# Altium PCB PCB.PcbDoc
Units mm, origin at the board's own origin, x right, y up, seen from the top; angles counter-clockwise.
Board outline 48.3 x 16.3 mm, 2 copper layers (Top Layer, Bottom Layer), stack 1.271 mm thick; 28 components, 37 nets, 133 pads, 55 vias.
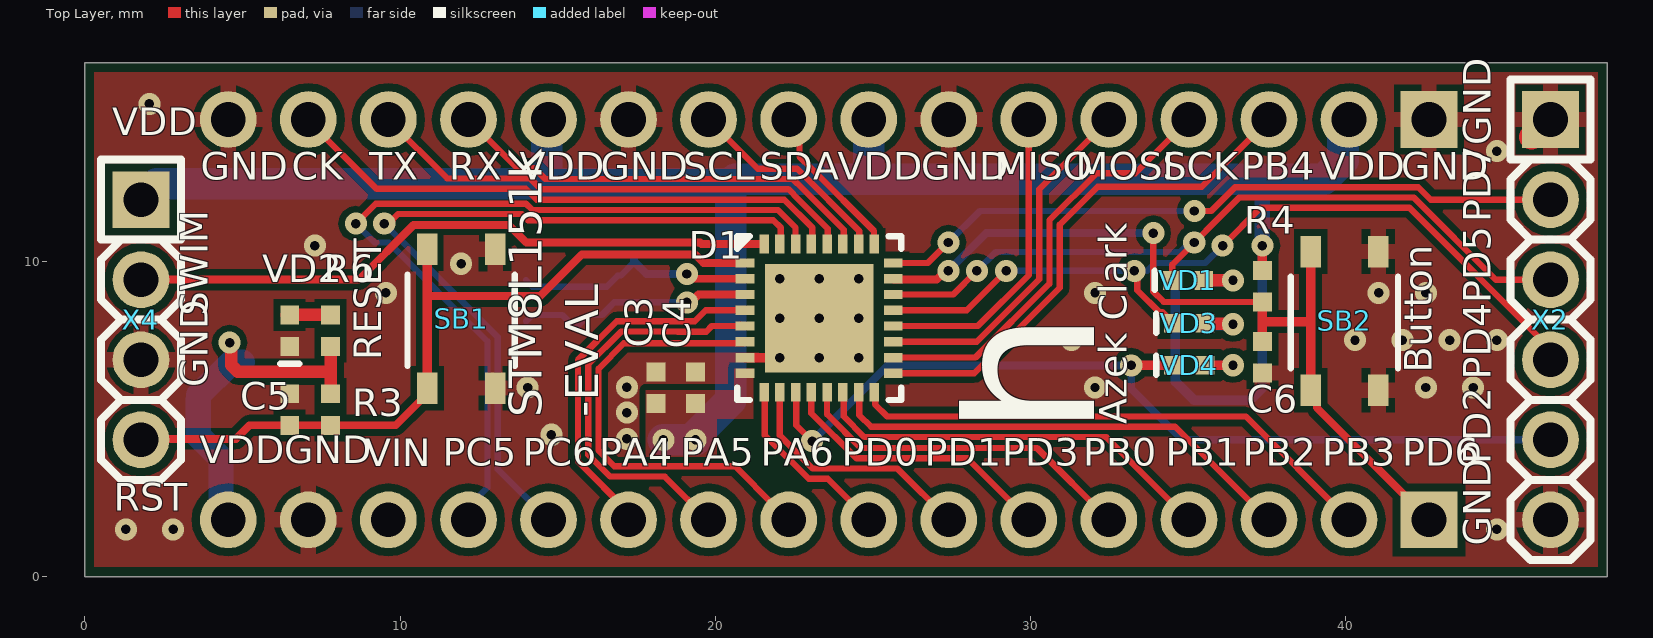
[diagram p0: Top Layer view]
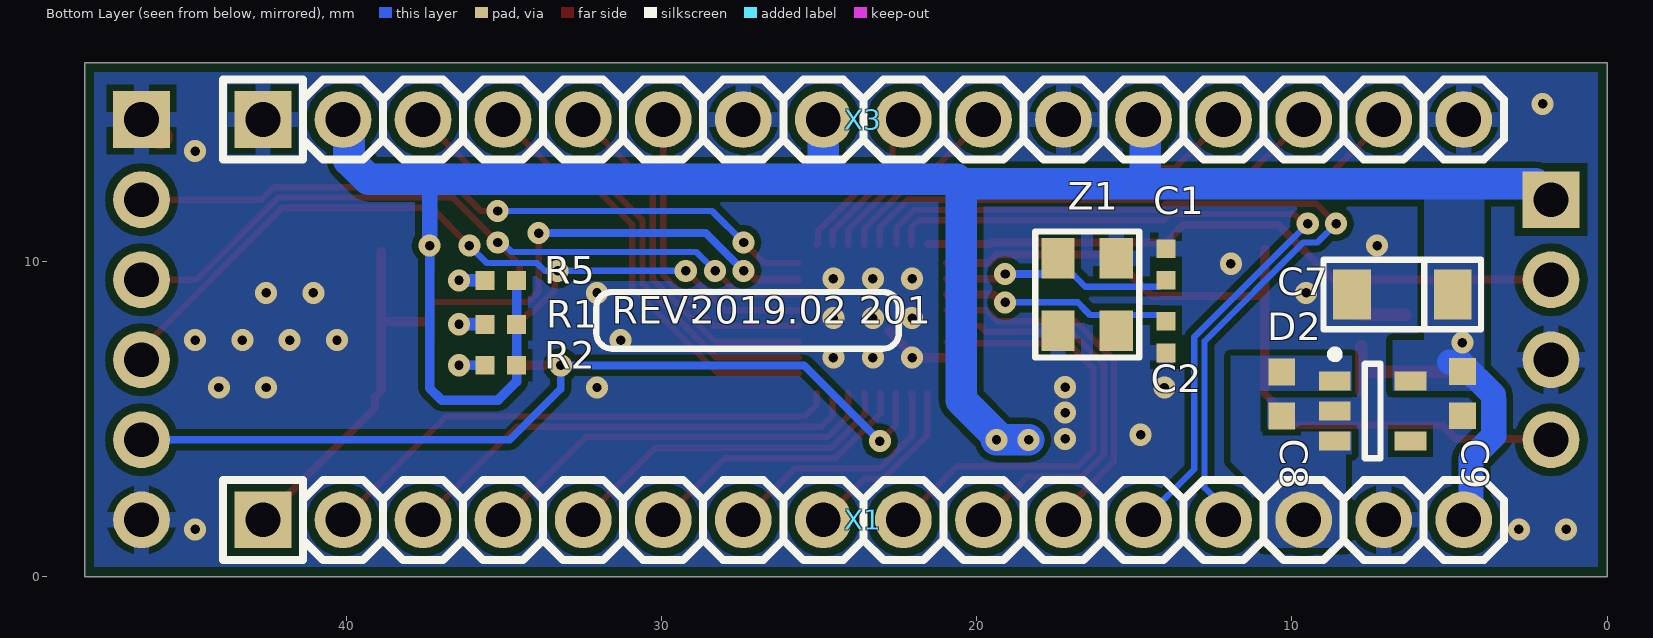
[diagram p1: Bottom Layer view, seen from below]
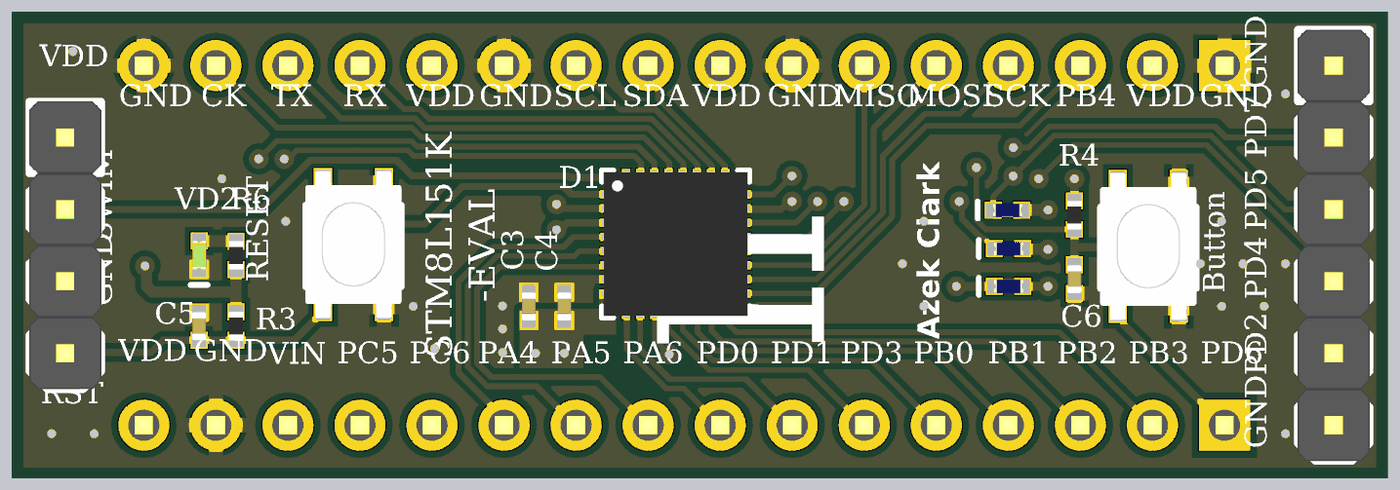
[diagram p2: 3D render of the assembled board from above, using the file's embedded part models]
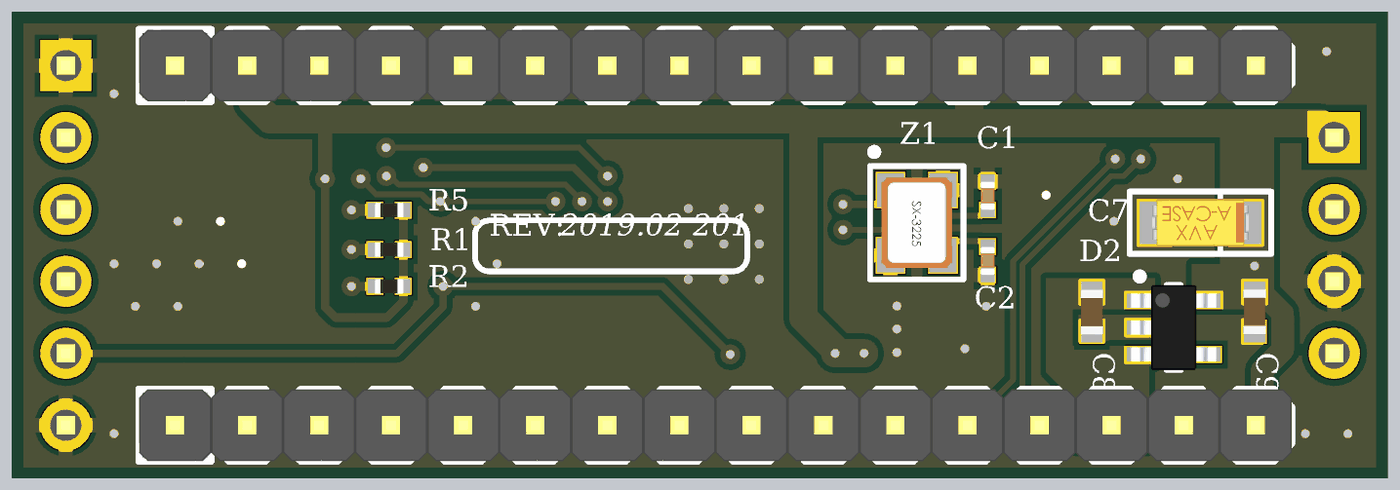
[diagram p3: 3D render of the assembled board from below, using the file's embedded part models]

## Layer stack, top to bottom
Top Solder: solder mask 0.0102, Solder Resist, Dk 3.5
Top Layer: signal copper 0.0356
Dielectric 1: dielectric 1.2, FR-4, Dk 4.8
Bottom Layer: signal copper 0.0356
Bottom Solder: solder mask 0.0102, Solder Resist, Dk 3.5

## Board outline
0,0 48.3,0 48.3,16.3 0,16.3

## Design rules (kind name [scope] priority, off if disabled: settings)
AcuteAngle [All] p1: minimum=4.50000000000000E+0001 checktracksonly=TRUE
BoardOutlineClearance [All] p1: gap=0.3 ignorepadtopadclearanceinfootprint=FALSE
Clearance Clearance_NPTH [All vs InPadClass('NPTH')] p1: gap=0.4 ignorepadtopadclearanceinfootprint=FALSE except(0: Arc-Hole Track-Hole SMDPad-Hole THPad-Hole Via-Hole Fill-Hole Poly-Hole Region-Hole Text-Hole)
Clearance Clearance_MultiLayerPad [OnLayer('Multi-Layer') and IsPad] p2: gap=0.25 ignorepadtopadclearanceinfootprint=FALSE except(0: Arc-Hole Track-Hole SMDPad-Hole THPad-Hole Via-Hole Fill-Hole Poly-Hole Region-Hole Text-Hole)
Clearance Clearance_Polygon [InPolygon] p3: gap=0.2 ignorepadtopadclearanceinfootprint=FALSE except(0: Arc-Hole Track-Hole SMDPad-Hole THPad-Hole Via-Hole Fill-Hole Poly-Hole Region-Hole Text-Hole)
Clearance [All] p4: gap=0.15 ignorepadtopadclearanceinfootprint=FALSE except(0: Arc-Hole Track-Hole SMDPad-Hole THPad-Hole Via-Hole Fill-Hole Poly-Hole Region-Hole Text-Hole; 0.127: Arc-Arc Arc-Track Track-Track)
ComponentClearance [All] p1: gap=0.254 collisioncheckmode=3 verticalgap=0.2 showdistances=FALSE
DiffPairsRouting [All] p1: maxlimit=0.254 minlimit=0.2 mostfreqgap=0.254 toplayer_minwidth=0.2 toplayer_maxwidth=0.5 toplayer_prefwidth=0.3 bottomlayer_minwidth=0.2 bottomlayer_maxwidth=0.5 bottomlayer_prefwidth=0.3 maxuncoupledlength=12.7
Height [All] p1: minheight=0 maxheight=60 prefheight=12.7
HoleSize [All] p1: absolutevalues=TRUE maxlimit=6.3 minlimit=0.3 maxpercent=80.000 minpercent=20.000
HoleToHoleClearance [All] p1: gap=0.5 allowstackedmicrovias=TRUE
MinimumAnnularRing [All] p1: minimumring=0.13
MinimumSolderMaskSliver [All] p1: minsoldermaskwidth=0.05
PasteMaskExpansion [All] p1: expansion=-0.05
PlaneClearance [All] p1: clearance=0.5
PlaneConnect [All] p1: planeconnectstyle=Relief reliefexpansion=0.5 reliefentries=4 reliefconductorwidth=0.3 reliefairgap=0.2
PolygonConnect PolygonConnect_PowerPAD [All vs InPadClass('PowerPAD')] p1: connectstyle=Relief reliefconductorwidth=1 reliefentries=4 polygonreliefangle="90 Angle" airgapwidth=0.3
PolygonConnect PolygonConnect_PadGND [InNet('GND') and IsPad] p2: connectstyle=Relief reliefconductorwidth=0.5 reliefentries=4 polygonreliefangle="90 Angle" airgapwidth=0.2
PolygonConnect PolygonConnect_Via [IsVia] p3: connectstyle=Direct reliefconductorwidth=0.254 reliefentries=4 polygonreliefangle="90 Angle" airgapwidth=0.254
PolygonConnect [All] p4: connectstyle=Relief reliefconductorwidth=0.6 reliefentries=4 polygonreliefangle="90 Angle" airgapwidth=0.3
RoomDefinition MCU [InComponentClass('MCU')] p1: confinementstyle=ConfineIn formatcopy=TRUE lockcomponents=FALSE outline 12.125,4.725 26.55,4.725 26.55,11.8 12.125,11.8
RoomDefinition Connector-SWIM [InComponentClass('Connector-SWIM')] p2: confinementstyle=ConfineIn formatcopy=TRUE lockcomponents=FALSE outline 0.125,2.7 14.05,2.7 14.05,13.65 0.125,13.65
RoomDefinition Connector-side-3 [InComponentClass('Connector-side-3')] p3: confinementstyle=ConfineIn formatcopy=TRUE lockcomponents=FALSE outline 44.849,0.199 44.849,16.201 48.151,16.201 48.151,0.199
RoomDefinition Connector-side-2 [InComponentClass('Connector-side-2')] p4: confinementstyle=ConfineIn formatcopy=TRUE lockcomponents=FALSE outline 2.899,12.849 2.899,16.151 44.301,16.151 44.301,12.849
RoomDefinition Connector-side-1 [InComponentClass('Connector-side-1')] p5: confinementstyle=ConfineIn formatcopy=TRUE lockcomponents=FALSE outline 2.899,0.149 2.899,3.451 44.301,3.451 44.301,0.149
RoomDefinition Board-user [InComponentClass('Board-user')] p6: confinementstyle=ConfineIn formatcopy=TRUE lockcomponents=FALSE outline 33.475,4.9 42.075,4.9 42.075,11.325 33.475,11.325
RoomDefinition Board-powersupply [InComponentClass('Board-powersupply')] p7: confinementstyle=ConfineIn formatcopy=TRUE lockcomponents=FALSE outline 3.4,3.3 10.9,3.3 10.9,10.5 3.4,10.5
RoutingVias [All] p1: holewidth=0.3 width=0.7 viastyle="Through Hole" minholewidth=0.3 minwidth=0.6 maxholewidth=0.5 maxwidth=1.2
SilkToSilkClearance [All] p1: silktosilkclearance=0
SilkToSolderMaskClearance [IsPad] p1: minsilkscreentomaskgap=0.1 clearancetoexposedcopper=TRUE
SolderMaskExpansion SolderMaskExpansion_VIa [isVia] p1: expansion=0.102 istentingtop=TRUE
SolderMaskExpansion [All] p2: expansion=0.05 istentingtop=FALSE
Width [All] p1: maxlimit=10 minlimit=0.127 preferedwidth=0.2
19 further rules are at their usual default settings.

## Classes and differential pairs
component class Connector-side-2: X3
component class MCU: C1 C2 C3 C4 D1 Z1
component class Connector-SWIM: C5 R3 SB1 X4
component class Connector-side-3: X2
component class Connector-side-1: X1
component class Board-user: C6 R1 R2 R4 R5 SB2 VD1 VD3 VD4
component class Board-powersupply: C7 C8 C9 D2 R6 VD2

## Components (designator, comment, footprint, x,y, rotation, side; value= is the part's Value field where it differs from the comment)
C1 "20pF" CH0402C 13.996,9.902 r270 bottom
C2 "20pF" CH0402C 13.996,7.6 r90 bottom
C3 "100nF" CH0402C 18.121,5.996 r270 top
C4 "10nF" CH0402C 19.375,5.996 r270 top
C5 "100nF" CH0402C 6.5,5.3 r270 top
C6 "100nF" CH0402C 37.36,6.96 r90 top
C7 "1µF" TANTAL_A 6.5,8.95 r0 bottom
C8 "100nF" CH0603CM 10.324,5.796 r90 bottom
C9 "100nF" CH0603CM 4.585,5.806 r90 bottom
D1 "STM8L151KxU6" 32-UFQFPN 23.3,8.2 r0 top
D2 "LN1154B332MR-G" SOT23-5 7.44,5.251 r180 bottom
R1 "270" CH0402R 35.1,8 r0 bottom
R2 "270" CH0402R 35.1,6.705 r0 bottom
R3 "10k" CH0402R 7.8,5.3 r90 top
R4 "10k" CH0402R 37.36,9.214 r270 top
R5 "270" CH0402R 35.1,9.4 r0 bottom
R6 "270" CH0402R 7.8,7.8 r90 top
SB1 "\"Кнопка\"" "BUT: YTS-A017" 11.94,8.18 r270 top
SB2 "\"Кнопка\"" "BUT: YTS-A017" 39.965,8.114 r270 top
VD1 "Blue" CH0402LB 35,9.4 r0 top
VD2 "Green" CH0402LG 6.5,7.804 r90 top
VD3 "Blue" CH0402LB 35.04,8.038 r0 top
VD4 "Blue" CH0402LB 35.04,6.705 r0 top
X1 "PLS-16" "CON: PLS-16" 23.6,1.8 r180 bottom
X2 "PLS-6" "CON: PLS-6" 46.5,8.15 r270 top
X3 "PLS-16" "CON: PLS-16" 23.6,14.5 r180 bottom
X4 "PLS-4R" "CON: PLS-4" 1.78,8.15 r270 top
Z1 "16 MHz" "OSC: 3225" 16.5,8.95 r270 bottom

## Footprints (in the part's own frame and the unit in brackets; to place one, negate y for a bottom-side part, rotate by r counter-clockwise, add the part's x,y. Pads: shape width x height; smd on the part's side, far side on the other; paste and mask are expansions set on the pad)
32-UFQFPN [mm] "32-lead, 5 x 5 mm, 0.5 mm pitch"
  rect 3.45x3.45 smd: 0(0,0)
  rect 0.6x0.3 smd: 1(-2.35,1.75) 2(-2.35,1.25) 3(-2.35,0.75) 4(-2.35,0.25) 5(-2.35,-0.25) 6(-2.35,-0.75) 7(-2.35,-1.25) 8(-2.35,-1.75) 17(2.35,-1.75) 18(2.35,-1.25) 19(2.35,-0.75) 20(2.35,-0.25) 21(2.35,0.25) 22(2.35,0.75) 23(2.35,1.25) 24(2.35,1.75)
  rect 0.3x0.6 smd: 9(-1.75,-2.35) 10(-1.25,-2.35) 11(-0.75,-2.35) 12(-0.25,-2.35) 13(0.25,-2.35) 14(0.75,-2.35) 15(1.25,-2.35) 16(1.75,-2.35) 25(1.75,2.35) 26(1.25,2.35) 27(0.75,2.35) 28(0.25,2.35) 29(-0.25,2.35) 30(-0.75,2.35) 31(-1.25,2.35) 32(-1.75,2.35)
  silkscreen extent -2.6,-2.6 2.6,2.6, body extent -2.56,-2.56 2.56,2.56, height 0.6
"BUT: YTS-A017" [mm] "Tactile button 5.2x3.4x2.5 SMD"
  rect 1x0.65 smd: 1(-2.2,1.075) 1(2.2,1.075) 2(-2.2,-1.075) 2(2.2,-1.075)
  silkscreen extent -1.4,-1.7 1.5,1.7, body extent -2.6,-1.7 2.6,1.7, height 2.5
CH0402C [mm]
  rect 0.6x0.6 smd: 1(-0.5,0) 2(0.5,0)
  body extent -0.5,-0.25 0.5,0.25, height 0.5
CH0402LB [mm]
  rect 0.6x0.6 smd: 1(0.5,0) 2(-0.5,0)
  silkscreen extent -1.05,-0.3 -1.05,0.3, body extent -0.5,-0.25 0.51,0.25, height 0.4
CH0402LG [mm]
  rect 0.6x0.6 smd: 1(0.5,0) 2(-0.5,0)
  silkscreen extent -1.05,-0.3 -1.05,0.3, body extent -0.5,-0.25 0.5,0.25, height 0.4
CH0402R [mm]
  rect 0.6x0.6 smd: 1(-0.5,0) 2(0.5,0)
  body extent -0.5,-0.25 0.5,0.26, height 0.33
CH0603CM [mm] "Chip Capacitor, 2-Leads, Body 1,53x0,85mm, IPC Medium Density"
  rect 0.85x0.85 smd: 1(-0.7,0) 2(0.7,0)
  body extent -0.8,-0.4 0.8,0.4, height 0.6
"CON: PLS-4" [mm] "PLS-40 4 pin header"
  rect 1.8x1.8 hole 1.1: 1(-3.81,0)
  round 1.8 hole 1.1: 2(-1.27,0) 3(1.27,0) 4(3.81,0)
  silkscreen extent -5.08,-1.27 5.08,1.27, body extent -5.08,-1.27 5.08,1.27, height 8.54
"CON: PLS-6" [mm]
  rect 1.8x1.8 hole 1.1: 1(-6.35,0)
  round 1.8 hole 1.1: 2(-3.81,0) 3(-1.27,0) 4(1.27,0) 5(3.81,0) 6(6.35,0)
  silkscreen extent -7.62,-1.27 7.62,1.27, body extent -7.62,-1.27 7.62,1.27, height 8.54
"CON: PLS-16" [mm]
  rect 1.8x1.8 hole 1.1: 1(-19.05,0)
  round 1.8 hole 1.1: 2(-16.51,0) 3(-13.97,0) 4(-11.43,0) 5(-8.89,0) 6(-6.35,0) 7(-3.81,0) 8(-1.27,0) 9(1.27,0) 10(3.81,0) 11(6.35,0) 12(8.89,0) 13(11.43,0) 14(13.97,0) 15(16.51,0) 16(19.05,0)
  silkscreen extent -20.32,-1.27 20.32,1.27, body extent -20.32,-1.27 20.32,1.27, height 8.54
"OSC: 3225" [mm]
  round 0.5 on Bottom Overlay: 0(-2.5,-1.5)
  rect 1.3x1.05 smd: 1(-1.15,-0.925) 2(1.15,-0.925) 3(1.15,0.925) 4(-1.15,0.925)
  silkscreen extent -2,-1.65 2,1.65, body extent -1.6,-1.25 1.6,1.25, height 0.81
SOT23-5 [mm] "SOT23, 5-Leads, Body 2,90x2,80mm, Pitch 0,95mm, IPC Medium Density"
  rect 1x0.6 smd: 1(-1.2,0.95) 2(-1.2,0) 3(-1.2,-0.95) 4(1.2,-0.95) 5(1.2,0.95)
  round 0.5 on Mech2: ""(-1.1,1.1)
  silkscreen extent -1.33,-1.5 0.25,1.92, body extent -1.5,-1.5 1.5,1.5, height 1.3
TANTAL_A [mm]
  rect 1.2x1.6 smd: 1(-1.6,0) 2(1.6,0)
  round 0.5 on Mech2: ""(-1.2,0.4)
  silkscreen extent -2.5,-1.1 2.5,1.1, body extent -1.7,-0.84 1.7,0.84, height 1.71

## Part data
C1 C2: library part Capacitor, Manufacturer=YAGEO, ComponentKind="NP0, 50V", HelpURL=https://lcsc.com/product-detail/Multilayer-Ceramic-Capacitors-MLCC-SMD-SMT_YAGEO-CC0402JRNPO9BN200_C107000.html, Model=CC0402JRNPO9BN200
C3 C4 C5 C6 C8 C9: library part Capacitor, Manufacturer=CCTC, ComponentKind="X7R, 50V"
  C3 C5 C6 C8 C9: HelpURL=https://lcsc.com/product-detail/Multilayer-Ceramic-Capacitors-MLCC-SMD-SMT_CCTC-TCC0402X7R104K250AT_C466234.html, Model=TCC0402X7R104K250AT
  C4: HelpURL=https://lcsc.com/product-detail/Multilayer-Ceramic-Capacitors-MLCC-SMD-SMT_CCTC-TCC0402X7R103M500AT_C696856.html, Model=TCC0402X7R103M500AT
C7: library part TantalCap
D1: "STM8", Manufacturer="ST Microelectronics", ComponentKind="1.8-3.6V, UFQFPN32", HelpURL=https://ru.mouser.com/datasheet/2/389/stm8l151c4-956418.pdf, Model=STM8L151KxU6
D2: library part LN1154, "LDO", Manufacturer=NATLINEAR, ComponentKind="SOT-23-5, 300mA, Vin: 2-7V", HelpURL=https://lcsc.com/product-detail/Dropout-Regulators-LDO_NATLINEAR-LN1154B332MR-G_C236379.html, Model=LN1154B332MR-G
R1 R2 R5 R6: library part Resistor, Manufacturer=YAGEO, ComponentKind="0402 resistor", HelpURL=https://lcsc.com/product-detail/Chip-Resistor-Surface-Mount_YAGEO-AC0402FR-07270RL_C138294.html, Model=AC0402FR-07270RL
R3: library part Resistor, Manufacturer="Uniroyal Elec", ComponentKind=±1%, HelpURL=https://lcsc.com/product-detail/Chip-Resistor-Surface-Mount_UNI-ROYAL-Uniroyal-Elec-0402WGF1002TCE_C25744.html, Model=0402WGF1002TCE
R4: library part Resistor, Manufacturer="UNI-ROYAL(Uniroyal Elec)", ComponentKind="0402 resistor ±1%", HelpURL=https://lcsc.com/product-detail/Chip-Resistor-Surface-Mount_UNI-ROYAL-Uniroyal-Elec-0402WGF1003TCE_C25741.html, Model=0402WGF1003TCE
SB1 SB2: library part "Tactile switches", "6x6 mm", Manufacturer=DGBZ, ComponentKind="SMT Tactile switch", HelpURL=https://lcsc.com/product-detail/Tactile-Switches_DGBZ-YTSA017A0252501B_C967796.html, Model=YTSA017A0252501B
VD1 VD2 VD3 VD4: library part LED, Manufacturer=XINGLIGHT
  VD1 VD3 VD4: ComponentKind="Blue led, 2.8V, 5mA", HelpURL=https://lcsc.com/product-detail/Pre-ordered-Products_XINGLIGHT-XL-1005UBC_C965795.html, Model=XL-1005UBC
  VD2: ComponentKind="Green led, 2.8V, 5mA", HelpURL=https://lcsc.com/product-detail/Light-Emitting-Diodes-LED_XINGLIGHT-XL-1005UGC_C965793.html, Model=XL-1005UGC
X1 X3: library part 16-Connector, Model=PLS-16
X2: library part 6-Connector, Model=PLS-6
X4: library part 4-Connector, Model=PLS-4R
Z1: library part Generator, Manufacturer=JWT, ComponentKind="±10ppm 20pF 60Ω", HelpURL=https://lcsc.com/product-detail/SMD-Crystal-Resonators_JWT-JF4016M00020T8188090_C726643.html, Model=JF4016M00020T8188090

## Via types
v1: diameter 0.7, hole 0.3, Top Layer to Bottom Layer, tented both sides, 55 vias

## Nets (pads, with @x,y where several pads share a name; then routed paths per layer and width w, separated by ;. In a path a pad name is that pad's centre, name@x,y a point inside that pad or via, vN(x,y) a via of type N, cw(c..) or ccw(c..) an arc to the next point about the centre after c; other vN are vias at no path point)
GND: C1.1 C2.1 C3.1 C4.1 C5.1 C6.1 C7.2 C8.1 C9.1 D1.0 D1.7 D2.2 SB1.1 SB2.1 VD2.2 X1.15 X2.1 X2.6 X3.1 X3.7 X3.11 X3.16 X4.3 Z1.2 Z1.4 | length 3.1
  Top Layer w0.3: D1.7 21.95,6.95 D1.0@22.8,7.8
  Top Layer w0.8: X2.1@45.9,13.95 X2.1@46.5,14.55
  other v1: 1.3,1.5 2.8,1.5 44.8,1.5 17.2,4.369 14.8,4.5 17.2,5.2 14.05,6 17.2,6.007 32.05,6 42.55,6 44.05,6 22.05,6.95 23.3,6.95 24.55,6.95 31.3,7.5 40.3,7.5 41.8,7.5 43.3,7.5 44.8,7.5 22.05,8.2 23.3,8.2 24.55,8.2 9.55,9 32.05,9 41.05,9 42.55,9 22.05,9.45 23.3,9.45 24.55,9.45 11.94,9.926 7.3,10.5 44.8,13.5 2.05,15
"I2C SCL": D1.26 X3.10 | length 6.7
  Top Layer w0.2: X3.10 21.349,12.941 22.598,12.941 24.575,10.964 D1.26@24.575,10.526
"I2C SDA": D1.25 X3.9 | length 5.1
  Top Layer w0.2: X3.9 22.674,14.156 22.674,13.327 23.042,12.96 25.038,10.963 25.038,10.562 D1.25@25.075,10.526
"MCU PA4": D1.4 X1.11 | length 11.7
  Top Layer w0.2: X1.11 17.25,2.05 15.646,3.654 15.646,6.871 16.879,8.104 18.851,8.104 18.855,8.1 19.348,8.1 19.698,8.45 D1.4
"MCU PA5": D1.5 X1.10 | length 12.9
  Top Layer w0.2: X1.10 19.773,1.8 18.4,3.173 16.665,3.173 15.973,3.865 15.973,6.735 17.015,7.777 18.8,7.777 18.804,7.773 19.713,7.773 19.891,7.95 20.75,7.95 D1.5@20.8,8
"MCU PA6": D1.6 X1.9 | length 13.9
  Top Layer w0.2: D1.6 20.9,7.4 17.1,7.4 16.3,6.6 16.3,4 16.8,3.5 20.63,3.5 X1.9@21.894,2.236
"MCU PB0": D1.13 X1.5 | length 11
  Top Layer w0.2: D1.13@23.575,5.826 23.55,5.801 23.55,5.149 24.618,4.081 30.209,4.081 X1.5
"MCU PB1": D1.14 X1.4 | length 13.1
  Top Layer w0.2: D1.14@24.075,5.826 24.075,5.087 24.735,4.427 32.403,4.427 X1.4
"MCU PB2": D1.15 X1.3 | length 15.1
  Top Layer w0.2: D1.15@24.575,5.826 24.575,5.125 24.946,4.754 34.591,4.754 37.545,1.8 X1.3
"MCU PB3": D1.16 X1.2 | length 16.9
  Top Layer w0.2: D1.16@25.075,5.826 25.075,5.457 25.451,5.081 36.829,5.081 X1.2
"MCU PB4": D1.17 X3.3 | length 16.4
  Top Layer w0.2: D1.17 28.221,6.45 30.931,9.16 30.931,11.169 32.134,12.371 35.441,12.371 X3.3
"MCU PC5": D1.30 X1.13 | length 26.7
  Top Layer w0.2: v1(8.6,11.2) 9.234,11.834 13.997,11.834 14.198,11.633 21.98,11.633 22.55,11.063 D1.30
  Bottom Layer w0.2: v1(8.6,11.2) 9.2,10.6 9.638,10.6 12.773,7.465 12.773,2.817 12.17,2.214 X1.13
"MCU PC6": D1.31 X1.12 | length 25
  Top Layer w0.2: v1(9.5,11.2) 9.635,11.2 9.942,11.507 13.862,11.507 14.063,11.306 21.845,11.306 22.075,11.076 D1.31@22.075,10.526
  Bottom Layer w0.2: v1(9.5,11.2) 10.3,10.4 13.1,7.6 13.1,3.41 X1.12
"MCU PD0": D1.9 X1.8 | length 5.7
  Top Layer w0.2: D1.9@21.575,5.826 21.575,4.489 22.964,3.1 23.57,3.1 X1.8
"MCU PD1": D1.10 X1.7 | length 7.8
  Top Layer w0.2: D1.10@22.075,5.826 22.05,5.801 22.05,4.476 23.099,3.427 25.783,3.427 X1.7
"MCU PD2": D1.11 VD4.2 X2.5 | length 29.1
  Top Layer w0.2: D1.11@22.575,5.826 22.575,4.8 v1(23.075,4.3)
  Top Layer w0.3: v1@33.419,6.705 VD4.2 ; X2.5@46.084,4.39 X2.5@46.5,4.39
  Bottom Layer w0.25: v1(23.075,4.3) 25.475,6.7 v1(33.2,6.7) 33.2,5.957 34.817,4.34 X2.5
"MCU PD3": D1.12 X1.6 | length 9
  Top Layer w0.2: D1.12@23.075,5.826 23.05,5.801 23.05,5.187 24.483,3.754 27.996,3.754 X1.6
"MCU PD4": D1.21 VD3.2 X2.4 | length 26.3
  Top Layer w0.2: D1.21 27.985,8.45 v1(29.235,9.7) ; v1(33.3,9.7) 33.396,9.604 33.396,9.088 34.097,8.387 34.191,8.387 VD3.2 ; v1(36.1,10.5) 37.3,11.7 42.029,11.7 X2.4@46.5,7.229
  Bottom Layer w0.2: v1(29.235,9.7) v1(33.3,9.7) 33.707,9.7 33.957,9.95 35.55,9.95 v1(36.1,10.5)
"MCU PD5": D1.22 VD1.2 X2.3 | length 24.7
  Top Layer w0.2: D1.22 27.55,8.95 v1(28.3,9.7) ; VD1.2 34.5,9.9 36.627,12.027 42.164,12.027 44.771,9.42 X2.3
  Bottom Layer w0.2: v1(28.3,9.7) 28.9,10.3 31.876,10.3 34.765,10.3 35.065,10.6 v1(35.2,10.6)
"MCU PD6": C6.2 D1.23 R4.2 SB2.2 X1.1 | length 27.2
  Top Layer w0.2: v1(33.9,10.9) 33.9,9.046 34.232,8.714 R4.2
  Top Layer w0.25: D1.23@25.675,9.426 27.028,9.426 27.303,9.7 v1(27.4,9.7) ; SB2.2@38.89,5.914 39.09,5.714 39.09,5.36 X1.1
  Top Layer w0.3: C6.2 37.36,8.087 ; R4.2 37.36,8.087 ; SB2.2@38.89,5.914 38.89,8.114 ; SB2.2@38.89,10.314 38.89,8.114 ; 37.36,8.087 38.863,8.087 38.89,8.114
  Bottom Layer w0.25: v1(27.4,9.7) 28.6,10.9 v1(33.9,10.9)
"MCU PD7": D1.24 X2.2 | length 22
  Top Layer w0.2: D1.24 26.75,9.95 v1(27.4,10.6) ; v1(35.206,11.6) 35.738,11.6 36.492,12.354 42.308,12.354 42.702,11.96 X2.2
  Bottom Layer w0.2: v1(27.4,10.6) 28.4,11.6 v1(35.206,11.6)
NetC1_2: C1.2 D1.2 Z1.1 | length 7.8
  Top Layer w0.25: v1(19.1,9.6) 19.222,9.6 19.372,9.45 D1.2
  Bottom Layer w0.2: C1.2 14.198,9.2 16.556,9.2 16.906,9.55 17,9.55 17.425,9.975 Z1.1
  Bottom Layer w0.25: Z1.1 17.425,10 17.825,9.6 v1(19.1,9.6)
NetC2_2: C2.2 D1.3 Z1.3 | length 7.7
  Top Layer w0.25: v1(19.1,8.7) 19.222,8.7 19.472,8.95 D1.3
  Bottom Layer w0.2: C2.2 14.196,8.3 15.15,8.3 15.575,7.875 16,8.3 16.409,8.3 16.598,8.489 16.598,8.502 16.796,8.7 v1(19.1,8.7)
NetR1_2: R1.2 VD3.1 | length 1.7
  Top Layer w0.4: VD3.1 35.557,8.022 36.412,8.022 v1(36.429,8.006)
  Bottom Layer w0.4: R1.2 35.603,8.003 36.426,8.003 v1(36.429,8.006)
NetR2_2: R2.2 VD4.1 | length 1.7
  Top Layer w0.3: VD4.1 v1(36.429,6.705)
  Bottom Layer w0.3: R2.2 v1(36.429,6.705)
NetR5_2: R5.2 VD1.1 | length 1.8
  Top Layer w0.4: VD1.1 v1(36.429,9.4)
  Bottom Layer w0.4: R5.2 v1(36.429,9.4)
NetR6_2: R6.2 VD2.1 | length 1.4
  Top Layer w0.4: VD2.1@6.4,8.3 6.402,8.302 7.798,8.302 R6.2
"SPI MISO": D1.20 X3.6 | length 9.9
  Top Layer w0.2: D1.20 28.334,7.95 29.95,9.566 X3.6
"SPI MOSI": D1.19 X3.5 | length 11.4
  Top Layer w0.2: D1.19 28.296,7.45 30.277,9.431 30.277,12.287 X3.5
"SPI SCK": D1.18 X3.4 | length 13.7
  Top Layer w0.2: D1.18 28.259,6.95 30.604,9.295 30.604,11.304 32.1,12.8 33.33,12.8 X3.4
"SWIM IO": D1.32 X4.2 | length 20.7
  Top Layer w0.25: X4.2@1.81,9.42 8.691,9.42 10.426,11.155 13.454,11.155 14.007,10.602 19.515,10.602 19.567,10.55 D1.32
"SWIM R\S\T\": C5.2 D1.1 R3.1 SB1.2 X4.4 | length 25
  Top Layer w0.25: X4.4@1.78,4.37 4.794,4.37 5.224,4.8 C5.2 R3.1 9.86,4.8 10.865,5.805 SB1.2@10.865,5.98 ; 10.865,8.9 14.449,8.9 15.774,10.225 19.359,10.225 19.634,9.95 D1.1
  Top Layer w0.3: SB1.2@10.865,5.98 10.865,8.9 SB1.2@10.865,10.38
"UART CK": D1.29 X3.15 | length 18
  Top Layer w0.2: X3.15 7.09,14.468 9.252,12.306 13.987,12.306 14.333,11.96 22.192,11.96 23.075,11.077 D1.29@23.075,10.526
"UART RX": D1.27 X3.13 | length 13.8
  Top Layer w0.2: X3.13 12.177,14.5 13.717,12.96 14.258,12.96 14.604,12.614 22.463,12.614 22.79,12.287 24.075,11.002 D1.27@24.075,10.526
"UART TX": D1.28 X3.14 | length 15.9
  Top Layer w0.2: X3.14 11.497,12.633 14.123,12.633 14.469,12.287 22.327,12.287 22.654,11.96 23.575,11.039 D1.28@23.575,10.526
VDD-MAIN: C3.2 C4.2 C7.1 C9.2 D1.8 D2.5 R1.1 R2.1 R3.2 R4.1 R5.1 R6.1 X1.16 X3.2 X3.8 X3.12 X4.1 | length 79
  Top Layer w0.3: R4.1@37.34,9.734 R4.1 v1(37.36,10.5)
  Top Layer w0.4: v1(4.591,7.426) 4.648,7.368 4.648,6.706 4.853,6.5 7.8,6.5 ; R3.2@7.8,5.9 7.8,6.5 ; R6.1 7.8,6.5
  Bottom Layer w0.3: R5.1 R1.1 R2.1 34.6,6.187 35.187,5.6 36.983,5.6 37.36,5.977 v1(37.36,10.5) ; 37.36,12.39 37.57,12.6
  Bottom Layer w0.5: v1(37.36,10.5) 37.36,12.39
  Bottom Layer w0.8: X1.16 4.32,2.03 4.32,3.743 3.6,4.463 3.6,5.6 3.61,5.61 3.61,5.758 4.652,6.8 C9.2@5,6.8
  Bottom Layer w1: X4.1 2.28,12.46 14.65,12.46 ; X3.12 14.65,14.44 14.65,12.46 ; v1(18.358,4.34) v1(19.375,4.34) ; v1@19.3,4.4 20.5,5.6 20.5,12.46 ; X3.8 24.87,12.6 ; X3.2 39.919,14.309 39.919,13.216 39.303,12.6 37.57,12.6 29.43,12.6 24.87,12.6 ; 14.65,12.46 20.5,12.46 ; 20.5,12.46 20.64,12.6 24.87,12.6
VDD-VIN: C8.2 D2.1 D2.3 X1.14
pads on no net: C7. D2. D2.4 Z1.0

## Polygon pours and split planes (outlines as drawn)
VDD-MAIN on Top Layer "VDD-MAIN_L01_P003" (solid, pour order 3): 21.2,6.6 21.2,5 20.051,5 20.051,3.8 17.8,3.8 17.8,5 17.8,5.914 20.6,5.914 20.6,6.6
GND on Top Layer "GND_L01_P012" (solid, remove dead copper, pour order 12): 0.1,16.2 0.1,0.1 48.2,0.1 48.2,16.2
GND on Top Layer "GND_L01_P004" (solid, pour order 4): 21.3,6.796 21.3,7.1 16.7,7.1 16.7,6.1 20.4,6.1 20.4,6.801
GND on Top Layer "GND_L01_P005" (solid, pour order 5): -0.2,17.5
GND on Bottom Layer "GND_L02_P013" (solid, remove dead copper, pour order 13): 0.1,16.2 0.1,0.1 48.2,0.1 48.2,16.2
VDD-MAIN on Bottom Layer "VDD-MAIN_L02_P010" (solid, remove dead copper, pour order 10): 6.8,5.9 6.8,7.5 5.8,7.5 5.8,12 3.9,12 3.9,5.9
VDD-VIN on Bottom Layer "VDD-VIN_L02_P009" (solid, remove dead copper, pour order 9): 10.9,0.908 10.9,2.61 11.94,3.65 11.94,7 8.1,7 8.1,5.9 11,5.9 11,4.6 8.1,4.6 8.1,3.878 8.3,3.878 8.3,0.908

## Silkscreen, mask and mechanical layers (free items; w line width, h text height)
Top Overlay:
  text "VDD" at 0.874,13.711 h1.5
  text "GND" at 44.889,13.683 h1.5 r90
  text "GND" at 3.673,12.306 h1.5
  text "CK" at 6.568,12.306 h1.5
  text "TX" at 9.03,12.306 h1.5
  text "RX" at 11.569,12.306 h1.5
  text "VDD" at 13.794,12.306 h1.5
  text "GND" at 16.373,12.306 h1.5
  text "SCL" at 18.992,12.306 h1.5
  text "SDA" at 21.414,12.306 h1.5
  text "VDD" at 23.889,12.306 h1.5
  text "GND" at 26.533,12.306 h1.5
  text "MISO" at 28.875,12.306 h1.5
  text "MOSI" at 31.44,12.306 h1.5
  text "SCK" at 34.192,12.306 h1.5
  text "PB4" at 36.696,12.306 h1.5
  text "VDD" at 39.194,12.306 h1.5
  text "GND" at 41.773,12.306 h1.5
  text "PD7" at 44.889,11.241 h1.5 r90
  text "PD5" at 44.889,8.676 h1.5 r90
  text "SWIM" at 4.189,8.277 h1.5 r90
  text "RESET" at 9.689,6.865 h1.5 r90
  text "Button" at 43.028,6.468 h1.5 r90
  text "PD4" at 44.889,6.249 h1.5 r90
  text "GND" at 4.189,6.013 h1.5 r90
  text "STM8L151K / -EVAL" at 16.643,5.05 h1.8 r90
  text "Azek Clark" at 33.348,4.836 h1.5 r90
  text "h" at 34.109,4.418 h11 r90
  text "PD2" at 44.889,3.57 h1.5 r90
  text "VDD" at 3.644,3.311 h1.5
  text "GND" at 6.322,3.311 h1.5
  text "PC5" at 11.362,3.227 h1.5
  text "PC6" at 13.902,3.227 h1.5
  text "PA4" at 16.323,3.227 h1.5
  text "PA5" at 18.903,3.227 h1.5
  text "PA6" at 21.443,3.227 h1.5
  text "PD0" at 24.022,3.227 h1.5
  text "PD1" at 26.641,3.227 h1.5
  text "PD3" at 29.102,3.227 h1.5
  text "PB0" at 31.679,3.227 h1.5
  text "PB1" at 34.298,3.227 h1.5
  text "PB2" at 36.733,3.227 h1.5
  text "PB3" at 39.262,3.227 h1.5
  text "PD6" at 41.805,3.227 h1.5
  text "VIN" at 8.891,3.212 h1.5
  text "RST" at 0.913,1.811 h1.5
  text "GND" at 44.889,0.983 h1.5 r90
Bottom Overlay:
  lines w0.2: 32.075,8.531 ccw(c31.575,8.531) 31.575,9.031 22.975,9.031 ccw(c22.975,8.531) 22.475,8.531 22.475,7.731 ccw(c22.975,7.731) 22.975,7.231 31.575,7.231 ccw(c31.575,7.731) 32.075,7.731 32.075,8.531 ; 32.075,8.531 32.075,8.531
  text "2019.02 201" at 29.075,7.741 h1.5
  text "REV:" at 31.575,7.731 h1.5
Top Solder:
  region: 58.3,18.5
  region: 56.3,-23.5
  region: -33.7,20.5
Board Shape:
  the board outline again, w0.2